# Allegro board SMARTSLEEVESYSTEM.brd
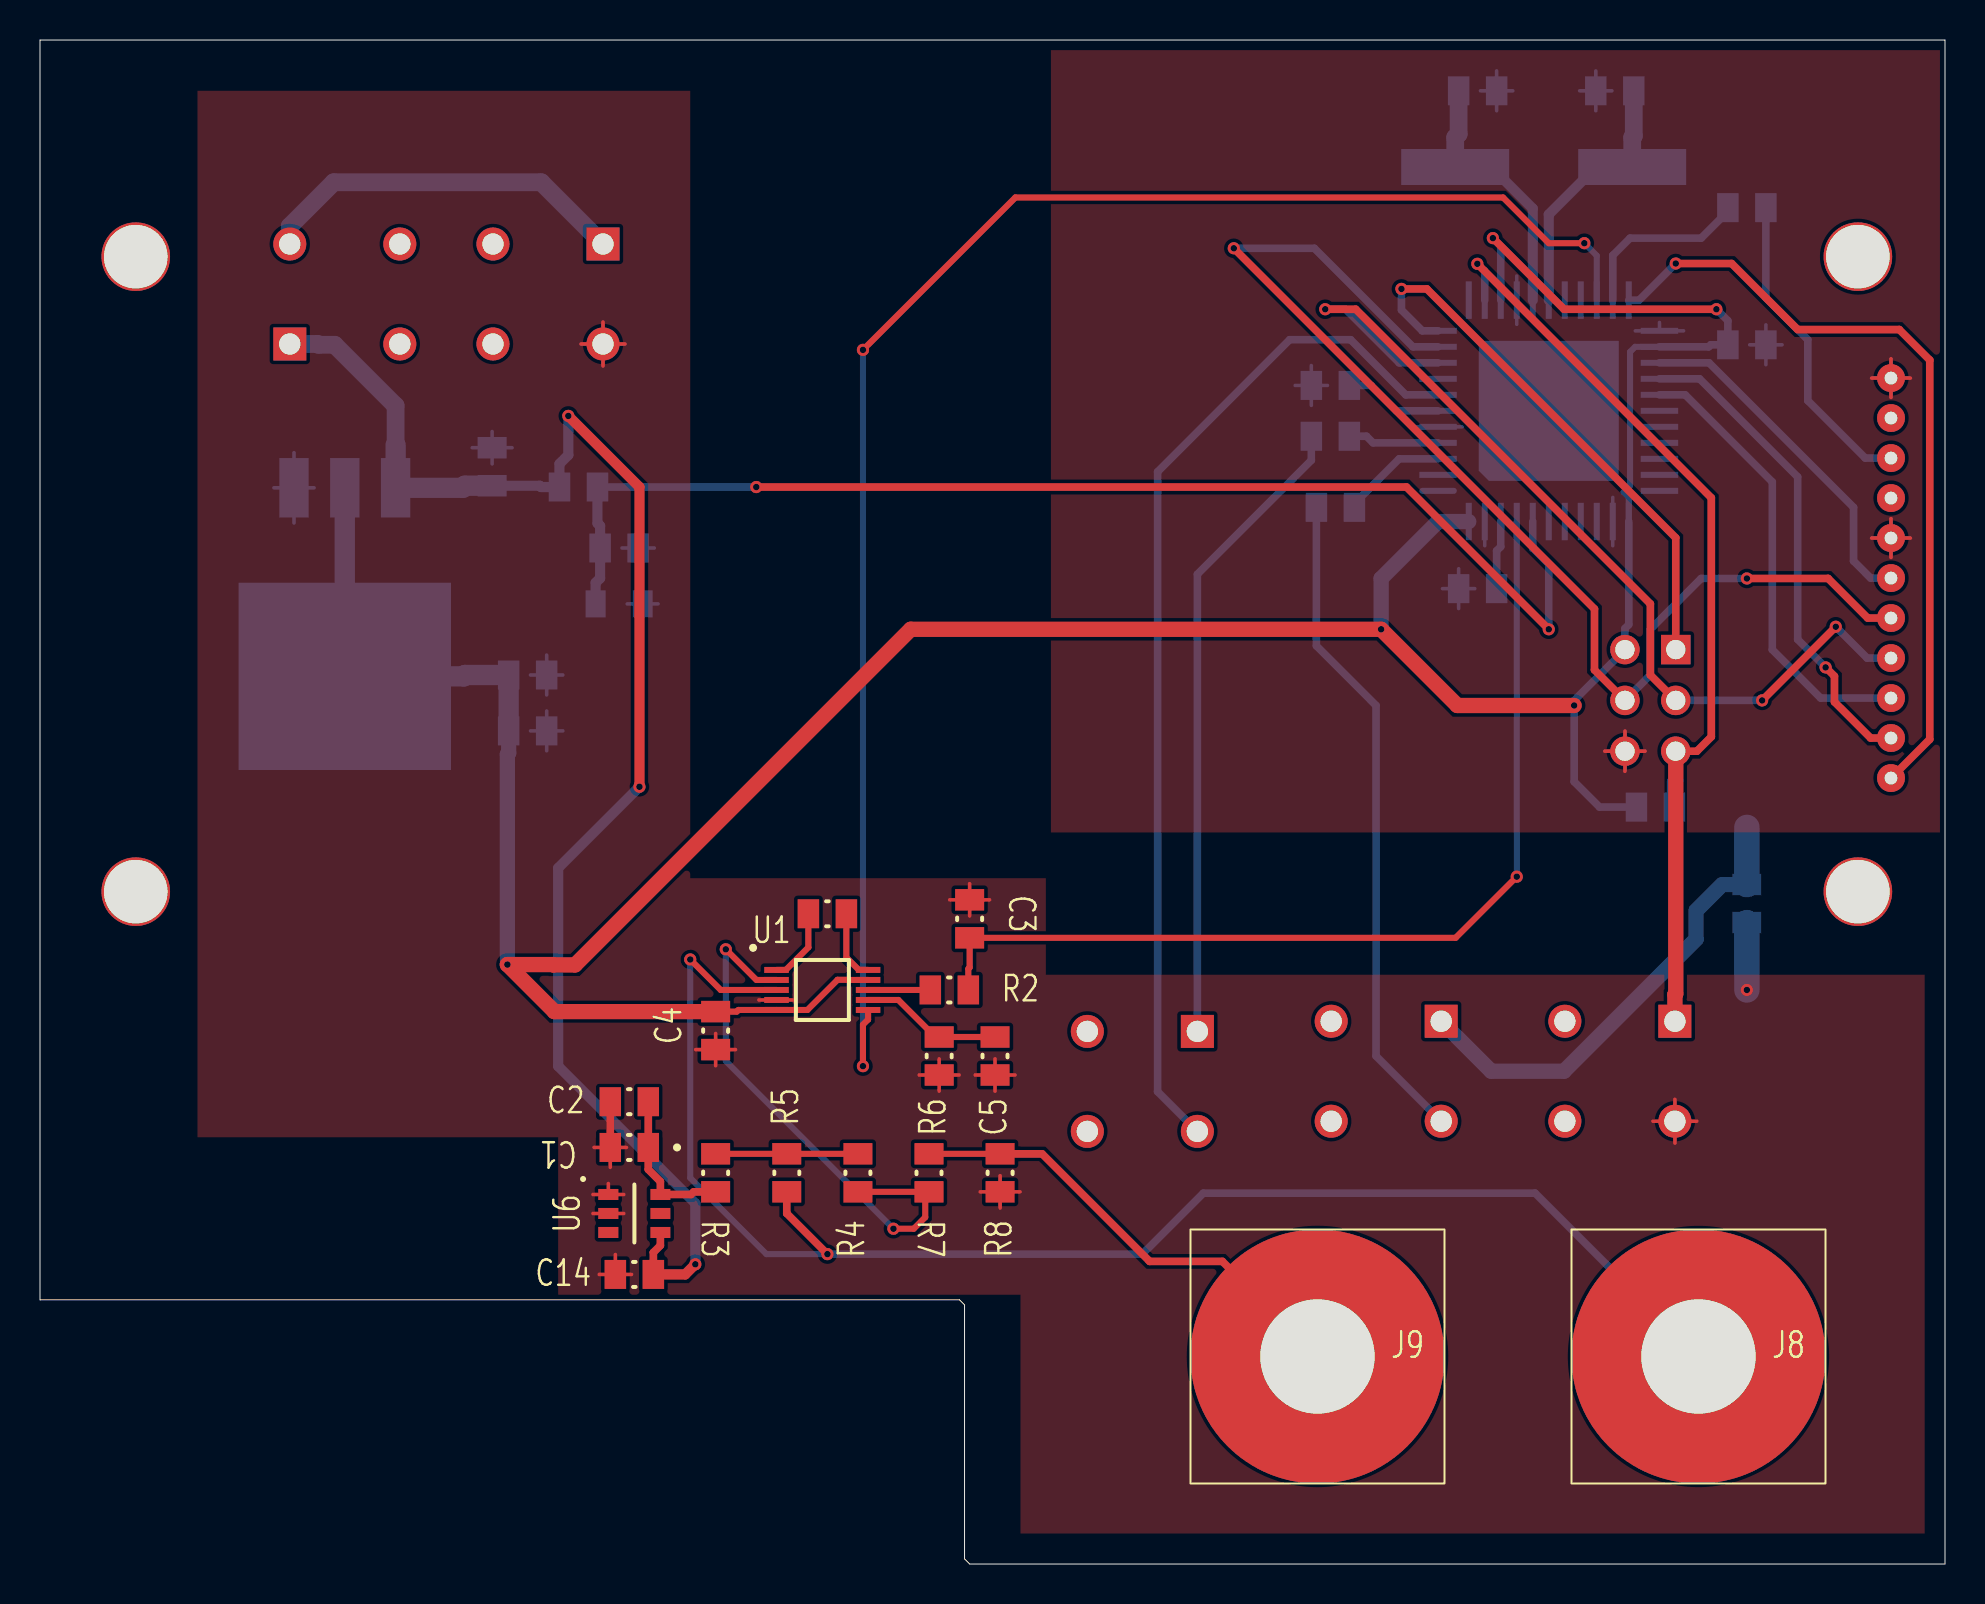
[diagram p0: board, top side]
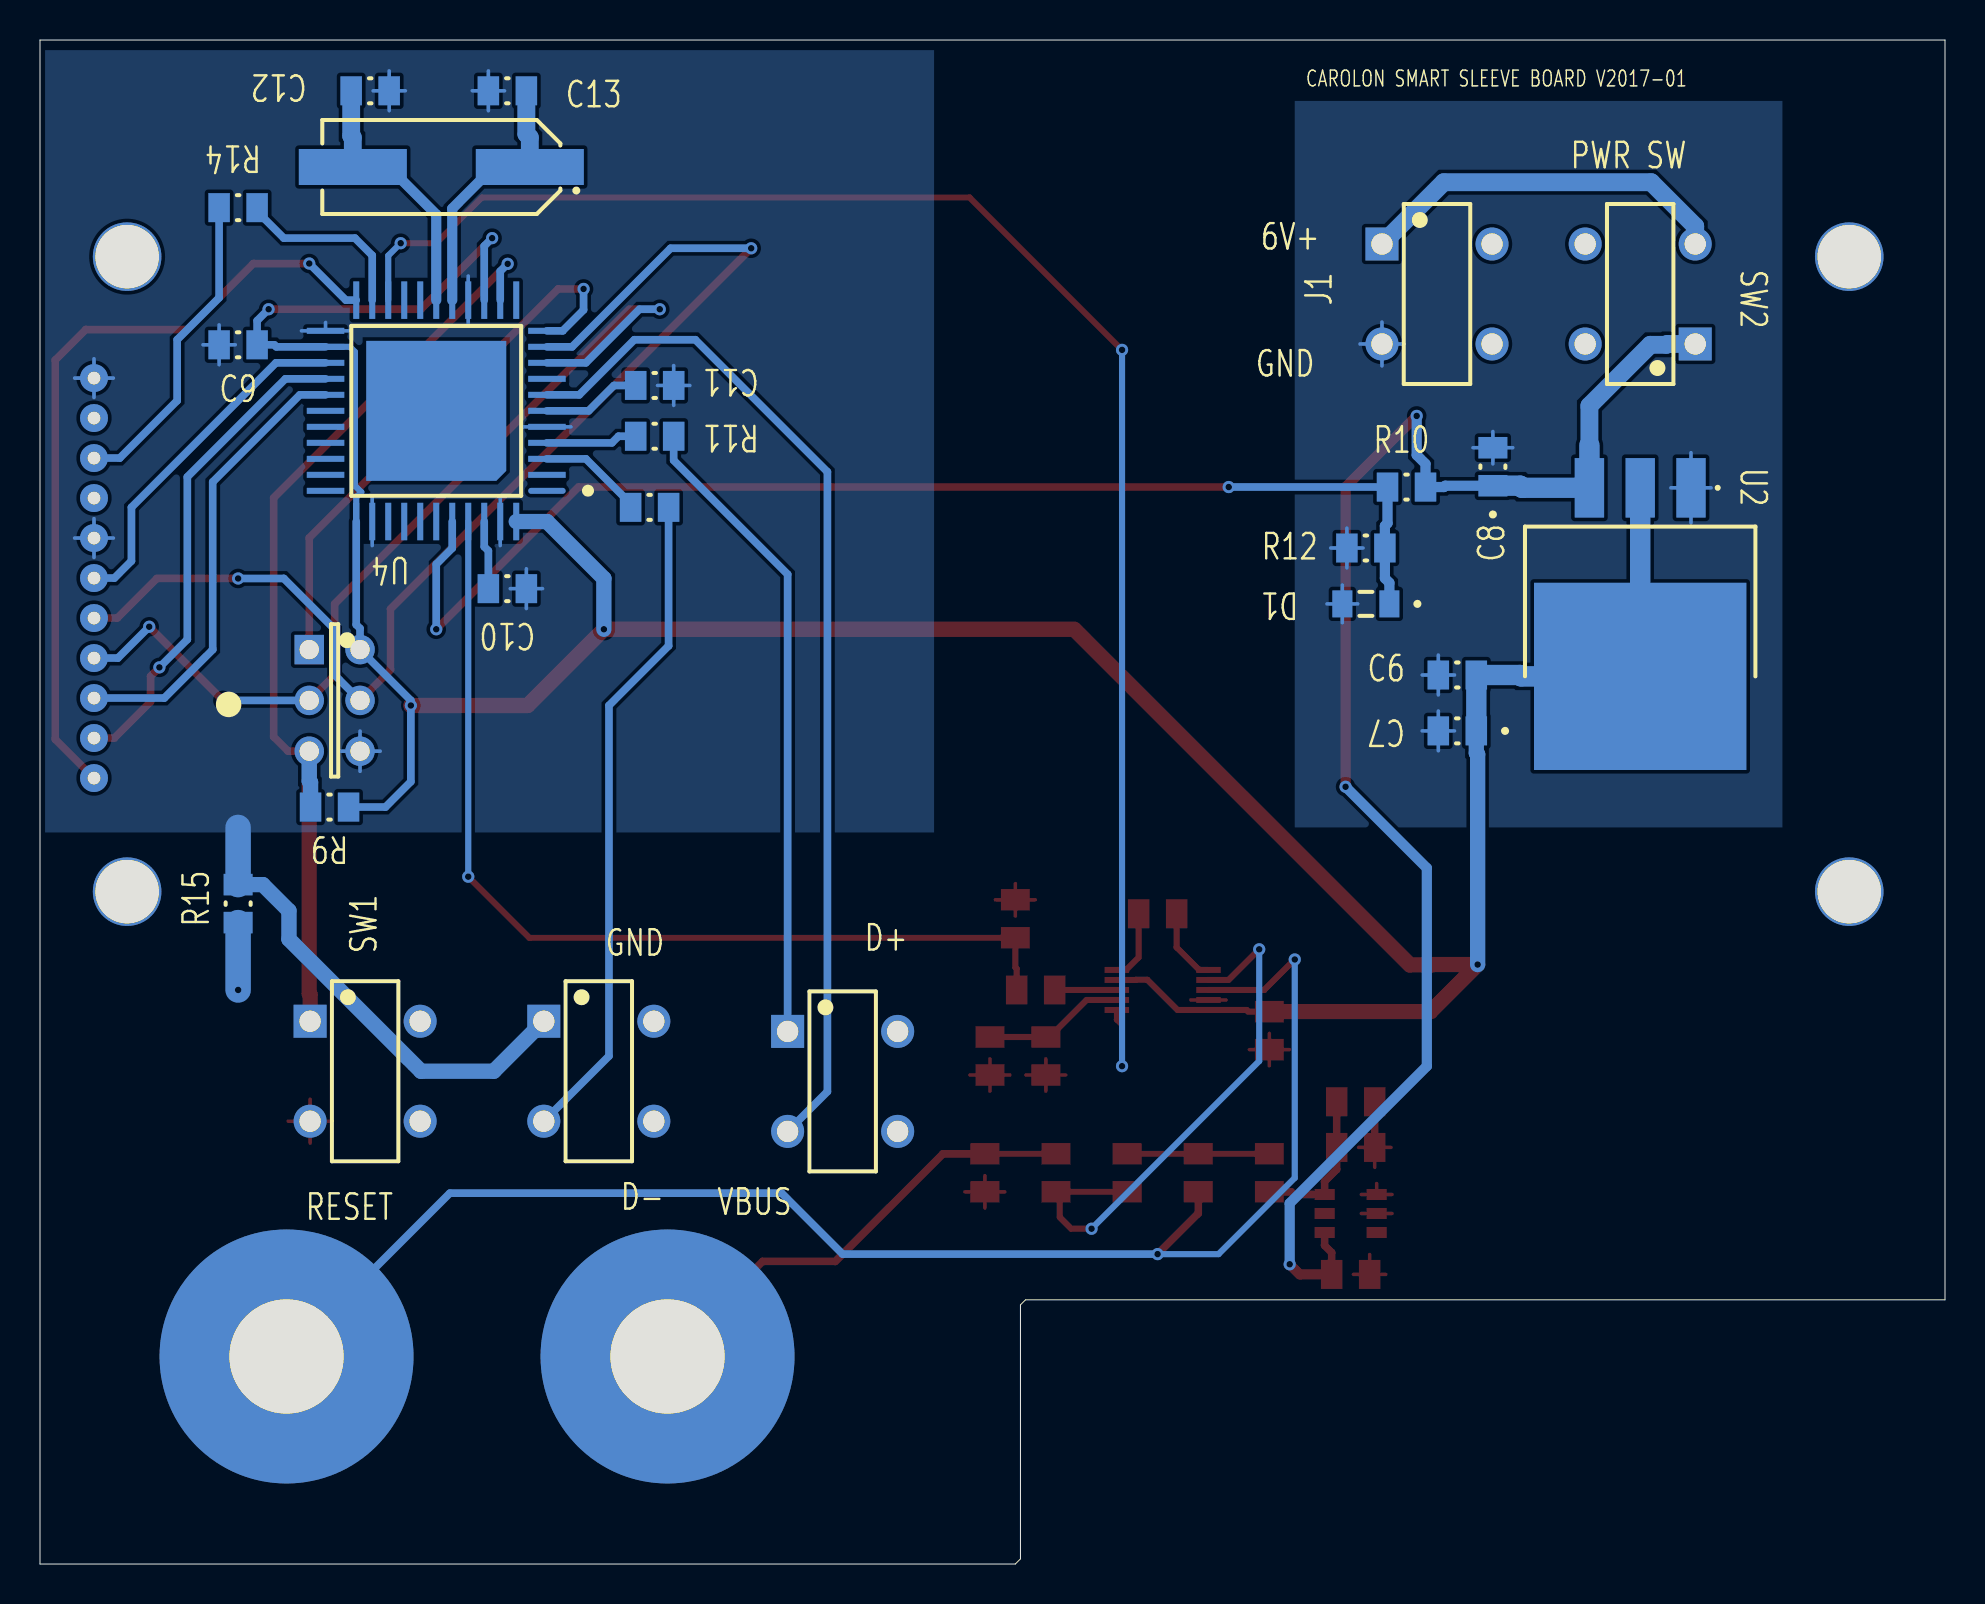
[diagram p1: board, bottom side, seen from below]

Outline 95.25 x 76.2 mm; copper layers: TOP, BOTTOM. Coordinates in mm from the lower left corner of the outline.
Outline path: 0,76.2 0,13.21 45.97,13.21 46.23,12.95 46.23,0.25 46.48,0 95.25,0 95.25,76.2 0,76.2

## Design rules (mm)
constraint set DEFAULT: min track width 0.178

## Placement (name value [footprint] x y rotation side)
C1  10uF  [CAPCP2013X140N]  29.46 20.83 180 top
C2  0.1uF  [CAPC2013X140N]  29.46 23.11 0 top
C3  1uF  [CAPC2013X140N]  46.48 32.26 270 top
C4  0.1uF  [CAPC2013X140N]  33.78 26.67 90 top
C5  1000pF  [CAPC2013X140N]  47.75 25.4 90 top
C6  0.1uF  [CAPC2013X140N]  24.38 44.45 180 bottom
C7  10uF  [CAPCP2013X140N]  24.38 41.66 0 bottom
C8  10uF  [CAPCP2013X140N]  22.61 54.86 90 bottom
C9  0.1uF  [CAPC2013X140N]  85.34 60.96 180 bottom
C10  0.1uF  [CAPC2013X140N]  71.88 48.77 0 bottom
C11  0.1uF  [CAPC2013X140N]  64.52 58.93 0 bottom
C12  18pF  [CAPC2013X140N]  78.74 73.66 0 bottom
C13  18pF  [CAPC2013X140N]  71.88 73.66 180 bottom
C14  0.1uF  [CAPC2013X140N]  29.72 14.48 0 top
D1  MM3Z3V3S  [DIOC2512X140N]  28.96 48.01 0 bottom
J1  CON_BATTERY_PACK  [DIP500P550X533-4N]  25.4 63.5 180 bottom
J2  CON_SPI  [DIP254P254X533-6N]  80.52 43.18 180 bottom
J4  CON_MNT  [HOLE125]  4.79 65.37 0 top
J5  CON_MNT  [HOLE125]  90.89 65.37 0 top
J6  CON_MNT  [HOLE125]  4.79 33.62 0 top
J7  CON_MNT  [HOLE125]  90.89 33.62 0 top
J8  CON_SENSOR  [129-0701-202]  82.92 10.38 0 top
J9  CON_SENSOR  [129-0701-202]  63.87 10.38 0 top
J10  CON_USB  [DIP500P550X533-4N]  55.12 24.13 180 bottom
J11  CON_USB  [DIP500P550X533-4N]  67.31 24.64 180 bottom
R1  100k  [RESC2013X140N]  39.37 32.51 180 top
R2  100  [RESC2013X140N]  45.47 28.7 0 top
R3  976  [RESC2013X140N]  33.78 19.56 270 top
R4  8.2k  [RESC2013X140N]  40.89 19.56 90 top
R5  8.2k  [RESC2013X140N]  37.34 19.56 90 top
R6  113k  [RESC2013X140N]  44.96 25.4 90 top
R7  8.2k  [RESC2013X140N]  44.45 19.56 270 top
R8  976  [RESC2013X140N]  48.01 19.56 90 top
R9  10k  [RESC2013X140N]  80.77 37.85 0 bottom
R10  10k  [RESC2013X140N]  26.92 53.85 180 bottom
R11  22  [RESC2013X140N]  64.52 56.39 0 bottom
R12  7.15k  [RESC2013X140N]  28.96 50.8 180 bottom
R13  22  [RESC2013X140N]  64.77 52.83 0 bottom
R14  100  [RESC2013X140N]  85.34 67.82 0 bottom
R15  0  [RESC2013X140N]  85.34 33.02 90 bottom
SW1  SW PUSHBUTTON  [DIP500P550X533-4N]  78.99 24.64 180 bottom
SW2  SW KEY-SPST  [DIP500P550X533-4N]  15.24 63.5 0 bottom
U1  INA327  [SOP50P440X140-10N]  39.12 28.7 0 top
U2  LD1086  [TO254P1394X457-4N]  15.24 47.5 270 bottom
U4  ATmega32u4  [QFP80P1200X1200X120-45N]  75.44 57.66 0 bottom
U5  -  [ST7565]  0 21.08 0 top
U6  LT1790-3.0  [SOT95P280X112-6N]  29.72 17.53 0 top
Y1  ZTA_16MHZ  [CRYSTAL1190X300N]  75.18 69.85 0 bottom

## Library data of the parts
C1 C7 C8 = C_elect
C2-C6 C9-C14 = C
D1 = MM3Z3V3S_0
J1 J10 J11 = CON2
J2 = CON6A
J4-J9 = CON1
R1-R15 = R
SW1 = SW PUSHBUTTON
SW2 = SW KEY-SPST
U1 = INA327_1
U2 = LD1086_2
U4 = ATMEGA128A4U_6
U5 = ST7565_1
U6 = LD1086_5
Y1 = ZTA

## Footprints (pads in the part's own frame, mm; a bottom-side part is the same pattern mirrored in y, then rotated)
129-0701-202
  round 12.7 hole 5.715: 1(0,0)
CAPC2013X140N
  rect 1.074x1.45 smd: 1(-0.95,0) 2(0.95,0)
CAPCP2013X140N
  rect 1.074x1.45 smd: N(0.95,0) P(-0.95,0)
CRYSTAL1190X300N
  rect 5.4x1.801 smd: 1(-4.425,0) 2(4.425,0)
DIOC2512X140N
  rect 1.001x1.349 smd: A(1.176,0) C(-1.176,0)
DIP254P254X533-6N
  rect 1.473x1.473 hole 0.965: 1(-1.27,2.54)
  round 1.473 hole 0.965: 2(1.27,2.54) 3(-1.27,0) 4(1.27,0) 5(-1.27,-2.54) 6(1.27,-2.54)
DIP500P550X533-4N
  round 1.651 hole 1.067: (2.751,-2.499) (2.751,2.499) 2(-2.751,-2.499)
  rect 1.651x1.651 hole 1.067: 1(-2.751,2.499)
HOLE125
  round 3.429 hole 3.175: 1(0,0)
QFP80P1200X1200X120-45N
  oval 1.875x0.3 smd: 1(-5.535,4)
  rect 1.875x0.3 smd: 2(-5.535,3.2) 3(-5.535,2.4) 4(-5.535,1.6) 5(-5.535,0.8) 6(-5.535,0) 7(-5.535,-0.8) 8(-5.535,-1.6) 9(-5.535,-2.4) 10(-5.535,-3.2) 11(-5.535,-4) 23(5.535,-4) 24(5.535,-3.2) 25(5.535,-2.4) 26(5.535,-1.6) 27(5.535,-0.8) 28(5.535,0) 29(5.535,0.8) 30(5.535,1.6) 31(5.535,2.4) 32(5.535,3.2) 33(5.535,4)
  rect 0.3x1.875 smd: 12(-4,-5.535) 13(-3.2,-5.535) 14(-2.4,-5.535) 15(-1.6,-5.535) 16(-0.8,-5.535) 17(0,-5.535) 18(0.8,-5.535) 19(1.6,-5.535) 20(2.4,-5.535) 21(3.2,-5.535) 22(4,-5.535) 34(4,5.535) 35(3.2,5.535) 36(2.4,5.535) 37(1.6,5.535) 38(0.8,5.535) 39(0,5.535) 40(-0.8,5.535) 41(-1.6,5.535) 42(-2.4,5.535) 43(-3.2,5.535) 44(-4,5.535)
  custom 7x7 smd: 45(0,0)
RESC2013X140N
  rect 1.074x1.45 smd: 1(-0.95,0) 2(0.95,0)
SOP50P440X140-10N
  rect 1.224x0.3 smd: 1(-2.289,1.001) 2(-2.289,0.5) 3(-2.289,0) 4(-2.289,-0.5) 5(-2.289,-1.001) 6(2.289,-1.001) 7(2.289,-0.5) 8(2.289,0) 9(2.289,0.5) 10(2.289,1.001)
SOT95P280X112-6N
  rect 1.001x0.551 smd: 1(-1.3,0.95) 2(-1.3,0) 3(-1.3,-0.95) 4(1.3,-0.95) 5(1.3,0) 6(1.3,0.95)
ST7565
  round 1.397 hole 0.635: 1(92.55,18.214) 2(92.55,20.216) 3(92.55,22.215) 4(92.55,24.214) 5(92.55,26.215) 6(92.55,28.214) 7(92.55,30.216) 8(92.55,32.215) 9(92.55,34.214) 10(92.55,36.215) 11(92.55,38.214)
TO254P1394X457-4N
  rect 2.974x1.471 smd: 1(-6.312,2.54) 2(-6.312,0) 3(-6.312,-2.54)
  rect 9.36x10.62 smd: 4(3.117,0)

## Nets
GND: C9.1 C10.1 C11.1 C12.1 C13.1 J2.6 J11.1 R15.2 U4.5 U4.15 U4.23 U4.35 U4.43 U5.7 U5.11
VBUS: J10.2 U4.7
VCC_3V3: C4.2 C6.2 C7.P C9.2 J2.2 R9.1 U1.5 U1.9 U2.2 U2.4(OUT1) U4.14 U4.24 U4.34 U4.44
VCC_BATT: C8.P C14.2 R10.2 SW2.1 U2.3 U6.4
VIN-: R4.1 R7.2 U1.2
0: C1.N(-) C2.1 C3.1 C4.1 C5.1 C6.1 C7.N(-) C8.N(-) C14.1 D1.A J1.2 R6.1 R8.1 R12.1 R15.1 SW1.2 U1.4 U2.1 U6.1 U6.2
ADC_BATT: D1.C(K) R10.1 R12.2 U4.40
ADC_ENABLE: U1.6 U4.20
ADC_SENSOR: C3.2 R2.2 U4.41
D+: J10.1 R11.1
D-: J11.2 R13.1
LCD_A0: U4.27 U5.3
LCD_CS: U4.22 U5.1
LCD_ENABLE: U4.25 U5.6
LCD_RST: U4.26 U5.2(\\R\S\T)
LED_ENABLE: R14.1 U4.21
MISO: J2.1 U4.11
MOSI: J2.4 U4.10 U5.5
RS+: J8.1 R5.1 U1.3
RS-: J9.1 R7.1 R8.2
RST: J2.5 R9.2 SW1.1 U4.13(\\R\E\S\E\T)
SCK: J2.3 U4.9 U5.4
N36170: R3.1 R4.2 R5.2
N38056: R11.2 U4.4
N38064: R13.2 U4.3
N38439: C12.2 U4.17 Y1.2
N38443: C13.2 U4.16 Y1.1
N38761: C11.2 U4.6
N39101: C10.2 U4.42
N43629: J1.1 SW2.2
N45603: R14.2 U5.9
N52956: R1.2 U1.1
N53016: R2.1 U1.8
N53044: R1.1 U1.10
N53076: C5.2 R6.2 U1.7
N69103: C1.P C2.2 R3.2 U6.6(OUT)

Pads without a net: J4 1; J5 1; J6 1; J7 1; U4 1 2 8 12 18 19 28 29 30 31 32 33 36 37 38 39 45; U5 8 10; U6 3 5

## Via types
v1: diameter 0.61, hole 0.33, TOP to BOTTOM, 28 vias

## Routing (per net, layer and track width the routed paths; a pad name or vN(x,y) marks a point on that pad's centre or on a via; arc(x,y) is an arc through that point)
GND: length 77.9
  TOP w0.178: 92.55,50.33 U5.7 ; U5.7 92.55,52.27 ; U5.7 91.58,51.3 ; U5.7 93.52,51.3 ; 91.58,59.3 U5.11 ; U5.11 93.52,59.3 ; U5.11 92.55,60.26 ; U5.11 92.55,58.33 ; 78.24,40.64 J2.6 ; J2.6 79.25,39.63 ; J2.6 80.25,40.64 ; J2.6 79.25,41.65
  BOTTOM w0.178: U4.23 82.18,61.66 ; U4.23 79.77,61.66 ; U4.23 80.97,62.08 ; 77.79,72.66 C12.1 ; C12.1 76.98,73.66 ; C12.1 77.79,74.66 ; C12.1 78.6,73.66 ; 70.12,48.77 C10.1 ; C10.1 71.74,48.77 ; C10.1 70.93,49.76 ; C10.1 70.93,47.77 ; C13.1 73.64,73.66 ; C13.1 72.83,72.66 ; C13.1 72.83,74.66 ; C13.1 72.02,73.66 ; U5.11 93.52,59.3 ; U5.11 91.58,59.3 ; U5.11 92.55,58.33 ; U5.11 92.55,60.26 ; C9.1 86.29,61.96 ; C9.1 85.49,60.96 ; C9.1 86.29,59.96 ; C9.1 87.1,60.96 ; 63.57,57.93 C11.1 ; C11.1 62.76,58.93 ; C11.1 64.37,58.93 ; C11.1 63.57,59.92 ; 71.11,56.86 U4.5 68.7,56.86 ; 73.84,61.99 U4.15 73.84,64.4 ; U5.7 92.55,52.27 ; U5.7 93.52,51.3 ; U5.7 92.55,50.33 ; U5.7 91.58,51.3 ; 72.24,50.92 U4.43 72.24,53.33 ; J2.6 80.25,40.64 ; J2.6 79.25,41.65 ; J2.6 79.25,39.63 ; J2.6 78.24,40.64 ; 78.64,50.92 U4.35 78.64,53.33
  BOTTOM w0.762: J11.1 72.56,24.64 76.2,24.64 82.8,31.24 82.8,32.66 84.11,33.97 R15.2
  BOTTOM w1.27: R15.2 85.34,36.83
VBUS: length 51.7
  BOTTOM w0.381: U4.7 68.29,58.46 65.53,61.21 62.48,61.21 55.88,54.61 55.88,23.62 J10.2
VCC_3V3: length 171.3
  TOP w0.305: C4.2 34.84,27.62 34.92,27.7 U1.5 38.37,27.7 39.88,29.21 40.45,29.21 40.46,29.2 U1.9
  TOP w0.381: v1(83.82,62.74) 76.2,62.74 v1(72.64,66.29)
  TOP w0.762: v1(76.71,42.93) 70.87,42.93 v1(67.06,46.74) 43.54,46.74 26.75,29.95 25.67,29.95 25.65,29.97 v1(23.37,29.97) 25.72,27.62 C4.2
  BOTTOM w0.305: U4.24 79.76,60.86 79.5,60.6 79.5,53.91 79.18,53.59 79.44,53.34 U4.34
  BOTTOM w0.381: R9.1 77.98,37.85 76.71,39.12 v1(76.71,42.93) 76.71,43.18 J2.2 79.25,46.78 79.44,46.97 U4.34 ; U4.14 73.04,65.9 v1(72.64,66.29) ; U4.24 83.43,60.86 83.54,60.96 C9.2 84.39,62.16 v1(83.82,62.74)
  BOTTOM w0.762: v1(67.06,46.74) 67.06,49.28 69.9,52.12 U4.44 ; C7.P 23.43,40.55 23.37,40.48 v1(23.37,29.97)
  BOTTOM w1.016: C7.P C6.2 21.25,44.45 21.19,44.38 U2.4 U2.2
VCC_BATT: length 75.6
  TOP w0.381: C14.2 30.67,15.58 31.02,15.93 U6.4
  TOP w0.508: v1(29.97,38.86) 29.97,53.85 v1(26.42,57.4) ; C14.2 32.26,14.48 v1(32.77,14.99)
  BOTTOM w0.508: v1(26.42,57.4) 26.42,55.45 25.97,55.01 R10.2 25.05,53.85 24.99,53.91 C8.P ; v1(32.77,14.99) 32.77,18.03 25.91,24.89 25.91,34.8 v1(29.97,38.86)
  BOTTOM w0.889: SW2.1 13.89,61 13.93,60.96 14.73,60.96 17.78,57.91 17.78,55.93
  BOTTOM w1.016: 17.78,55.93 U2.3 21.14,53.81 21.24,53.91 C8.P
VIN-: length 27.3
  TOP w0.305: U1.2 35.82,29.2 v1(34.29,30.73) ; 44.26,18.61 44.26,17.34 43.69,16.76 v1(42.67,16.76) ; 44.26,18.61 R7.2 ; 44.26,18.61 R4.1
  BOTTOM w0.305: v1(42.67,16.76) 34.29,25.15 v1(34.29,30.73)
0: length 70.8
  TOP w0.178: 27.65,18.48 U6.1 ; U6.1 28.42,19.02 ; U6.1 29.19,18.48 ; 45.49,33.21 C3.1 ; C3.1 46.48,32.4 ; C3.1 47.48,33.21 ; C3.1 46.48,34.02 ; C5.1 48.75,24.45 ; C5.1 46.76,24.45 ; C5.1 47.75,23.64 ; C5.1 47.75,25.26 ; 44.96,23.64 R6.1 ; R6.1 44.96,25.26 ; R6.1 45.95,24.45 ; R6.1 43.96,24.45 ; 80.65,22.14 SW1.2 ; SW1.2 81.74,21.04 ; SW1.2 82.84,22.14 ; SW1.2 81.74,23.23 ; 27.71,20.83 C1.N ; C1.N 28.51,19.83 ; C1.N 29.32,20.83 ; 28.15,59.91 J1.2 ; J1.2 27.06,61 ; J1.2 28.15,62.1 ; J1.2 29.25,61 ; 27.96,14.48 C14.1 ; C14.1 29.58,14.48 ; C14.1 28.77,15.47 ; C4.1 34.78,25.72 ; C4.1 33.78,24.91 ; C4.1 33.78,26.53 ; C4.1 32.79,25.72 ; 29.19,17.53 U6.2 27.65,17.53 ; 37.71,28.2 U1.4 35.95,28.2 ; R8.1 48.01,19.42 ; R8.1 48.01,17.8 ; R8.1 49,18.61 ; R8.1 47.01,18.61
  TOP w0.381: C2.1 C1.N
  BOTTOM w0.178: U2.1 13.71,53.81 ; U2.1 12.7,55.57 ; U2.1 12.7,52.05 ; U2.1 11.69,53.81 ; R12.1 30.71,50.8 ; R12.1 29.1,50.8 ; R12.1 29.91,49.8 ; R12.1 29.91,51.8 ; 28.15,59.91 J1.2 ; J1.2 28.15,62.1 ; J1.2 27.06,61 ; J1.2 29.25,61 ; C6.1 25.33,45.45 ; C6.1 26.14,44.45 ; C6.1 24.53,44.45 ; C6.1 25.33,43.45 ; 21.61,55.81 C8.N ; C8.N 23.6,55.81 ; C8.N 22.61,56.62 ; C8.N 22.61,55.01 ; D1.A 30.13,48.95 ; D1.A 30.9,48.01 ; D1.A 30.13,47.06 ; D1.A 29.36,48.01 ; 24.53,41.66 C7.N ; C7.N 26.14,41.66 ; C7.N 25.33,42.65 ; C7.N 25.33,40.66
  BOTTOM w1.27: R15.1 v1(85.34,28.7)
ADC_BATT: length 62.2
  TOP w0.381: v1(75.44,46.74) 68.33,53.85 v1(35.81,53.85)
  BOTTOM w0.381: U4.40 74.64,50.79 75.44,49.99 v1(75.44,46.74) ; R10.1 v1(35.81,53.85)
  BOTTOM w0.508: R10.1 27.87,52.04 28.01,51.91 R12.2 28.01,49.29 27.78,49.06 D1.C
ADC_ENABLE: length 82
  TOP w0.305: v1(41.15,24.89) 41.15,26.96 41.4,27.22 U1.6 ; v1(41.15,60.71) 48.77,68.33 73.15,68.33 75.44,66.04 v1(77.22,66.04)
  BOTTOM w0.305: v1(41.15,60.71) v1(41.15,24.89) ; v1(77.22,66.04) 77.84,65.42 U4.20
ADC_SENSOR: length 49
  TOP w0.305: v1(73.84,34.37) 70.78,31.31 C3.2 46.48,29.82 46.42,29.76 R2.2
  BOTTOM w0.305: U4.41 v1(73.84,34.37)
D+: length 32.1
  BOTTOM w0.381: J10.1 57.87,49.49 63.57,55.18 R11.1
D-: length 33.3
  BOTTOM w0.381: J11.2 66.8,25.4 66.8,42.93 63.82,45.91 R13.1
LCD_A0: length 22.8
  BOTTOM w0.381: U4.27 82.26,58.46 86.61,54.1 86.61,45.72 89.03,43.3 U5.3
LCD_CS: length 39.5
  TOP w0.381: U5.1 94.49,41.23 94.49,60.2 92.96,61.72 87.88,61.72 84.58,65.02 v1(81.79,65.02)
  BOTTOM w0.381: v1(81.79,65.02) 79.96,63.19 U4.22
LCD_ENABLE: length 17.6
  BOTTOM w0.381: U4.25 83.45,60.06 90.68,52.83 90.68,50.15 91.53,49.3 U5.6
LCD_RST: length 24.5
  TOP w0.381: U5.2 91.53,41.3 89.72,43.11 89.72,44.39 v1(89.28,44.83)
  BOTTOM w0.381: v1(89.28,44.83) 87.88,46.23 87.88,54.35 82.98,59.26 U4.26
LED_ENABLE: length 9.1
  BOTTOM w0.381: R14.1 84.39,67.63 83.06,66.29 79.5,66.29 78.64,65.43 U4.21
MISO: length 27.8
  TOP w0.381: v1(68.07,63.75) 69.34,63.75 81.79,51.31 J2.1
  BOTTOM w0.381: v1(68.07,63.75) 68.07,62.7 69.12,61.66 U4.11
MOSI: length 60.9
  TOP w0.381: U5.5 91.39,47.3 89.41,49.28 v1(85.34,49.28) ; v1(59.69,65.79) 77.72,47.75 77.72,44.7 J2.4
  BOTTOM w0.381: v1(59.69,65.79) 63.72,65.79 68.65,60.86 U4.10 ; J2.4 80.52,44.45 80.52,46.74 83.06,49.28 v1(85.34,49.28)
RS+: length 76.5
  TOP w0.305: U1.3 34.04,28.7 v1(32.51,30.23)
  TOP w0.381: v1(39.37,15.49) 37.34,17.53 R5.1
  BOTTOM w0.305: v1(39.37,15.49) 36.32,15.49 32.51,19.3 v1(32.51,30.23)
  BOTTOM w0.381: v1(39.37,15.49) 55.12,15.49 58.17,18.54 74.76,18.54 J8.1
RS-: length 23.6
  TOP w0.305: R7.1 R8.2
  TOP w0.381: R8.2 50.1,20.51 55.48,15.13 59.12,15.13 J9.1
RST: length 48.9
  TOP w0.381: J2.5 82.84,40.64 83.57,41.36 83.57,53.31 v1(71.87,65.01)
  TOP w0.762: J2.5 81.79,28.51 81.74,28.47 SW1.1
  BOTTOM w0.381: U4.13 72.24,64.64 v1(71.87,65.01)
  BOTTOM w0.762: R9.2 81.72,39.08 81.79,39.15 J2.5
SCK: length 47.4
  TOP w0.381: J2.3 80.52,44.45 80.52,48.01 65.79,62.74 v1(64.26,62.74) ; v1(89.79,46.86) v1(86.11,43.18)
  BOTTOM w0.381: v1(64.26,62.74) 65.28,62.74 67.96,60.06 U4.9 ; v1(86.11,43.18) J2.3 ; U5.4 91.36,45.3 v1(89.79,46.86)
N36170: length 7.1
  TOP w0.305: R3.1 R5.2 R4.2
N38056: length 4.6
  BOTTOM w0.381: U4.4 66.65,56.06 66.32,56.39 R11.2
N38064: length 5.3
  BOTTOM w0.381: U4.3 67.96,55.26 65.72,53.02 R13.2
N38439: length 13.3
  BOTTOM w0.508: U4.17 75.44,67.48 77.81,69.85 Y1.2
  BOTTOM w0.889: C12.2 79.69,71.41 79.61,71.33 Y1.2
N38443: length 13.2
  BOTTOM w0.508: Y1.1 72.56,69.85 74.64,67.77 U4.16
  BOTTOM w0.889: Y1.1 70.76,71.33 70.93,71.5 C13.2
N38761: length 5
  BOTTOM w0.381: C11.2 66.55,58.93 67.82,57.66 U4.6
N39101: length 3.4
  BOTTOM w0.381: U4.42 73.04,50.87 72.83,50.66 C10.2
N43629: length 18.7
  BOTTOM w0.889: SW2.2 12.49,66.89 14.69,69.09 25.06,69.09 J1.1
N45603: length 15.9
  BOTTOM w0.381: U5.9 91.26,55.3 88.39,58.17 88.39,61.21 86.29,63.31 R14.2
N52956: length 3.7
  TOP w0.305: R1.2 38.42,30.83 37.29,29.7 U1.1
N53016: length 3.1
  TOP w0.305: R2.1 U1.8
N53044: length 3.5
  TOP w0.305: R1.1 40.32,30.33 40.94,29.7 U1.10
N53076: length 7.1
  TOP w0.305: C5.2 R6.2 44.77,26.35 42.92,28.2 U1.7
N69103: length 7.7
  TOP w0.381: R3.2 32.68,18.61 32.55,18.48 U6.6 31.02,19.12 30.41,19.73 C1.P C2.2

## Copper pours and planes (outline as drawn; the poured copper is in the pictures)
GND on TOP: 50.55,36.58 50.55,75.69 95,75.69 95,36.58
GND on BOTTOM: 95,36.58 95,75.69 50.55,75.69 50.55,36.58
0 on TOP: 7.87,73.66 7.87,21.34 32.51,21.34 32.51,73.66
0 on TOP: 49.02,29.46 49.02,1.52 94.23,1.52 94.23,29.46
0 on TOP: 25.91,34.29 25.91,13.46 50.29,13.46 50.29,34.29
0 on BOTTOM: 8.13,36.83 8.13,73.15 32.51,73.15 32.51,36.83

## Text on the board
Ref Des/Silkscreen Bottom: CAROLON SMART SLEEVE BOARD V2017-01 | PWR SW | 6V+ | GND | D+ | VBUS | D- | RESET
